# EAGLE board MRCS-ODX4 (EAGLE 7.7.0)
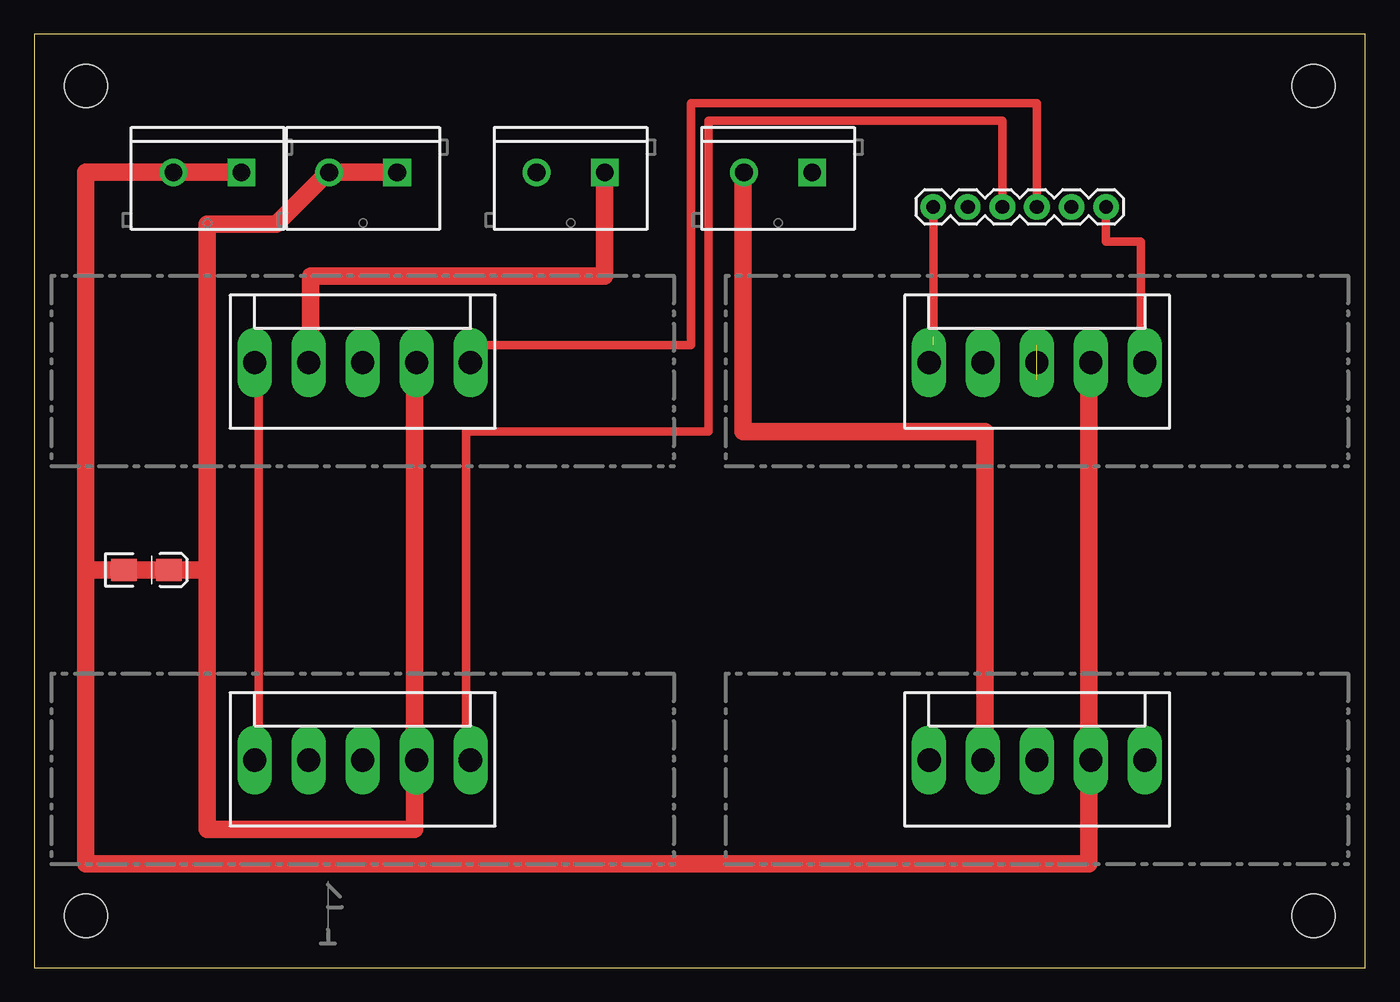
[diagram p0: board, top side]
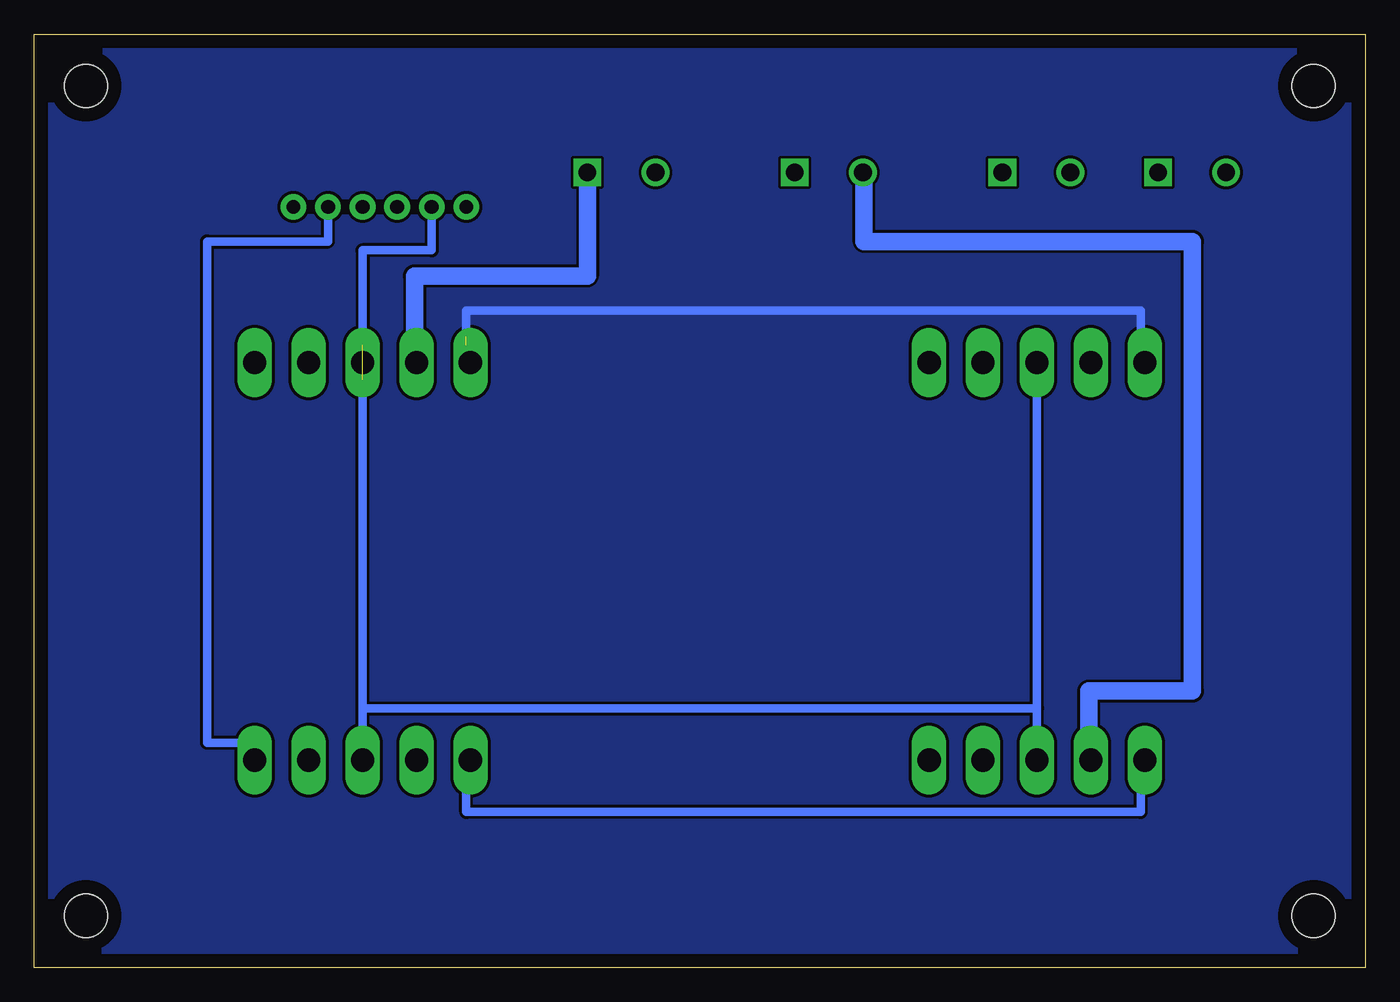
[diagram p1: board, bottom side, seen from below]

Size 97.79 x 68.58 mm. Coordinates in mm from the lower left corner, seen from the top.
Outline: 97.79,0 97.79,68.58 0,68.58 0,0 97.79,0
Copper layers (1*16): Top 0.035mm / dielectric 1.5mm / Bottom 0.035mm
Design rules "default": minimum track width 10mil, minimum drill 24mil, track to track 8mil, track to pad 8mil, pad to pad 8mil, via to via 8mil, smd to smd 8mil, copper to edge 40mil, drill to drill 8mil, minimum pad ring 10mil, minimum via ring 8mil, stop-mask expansion 4mil, vias tented up to drill 0mil, thermal gap 10mil

## Footprints (pad centres in the part's own frame; a part is rotated, then mirrored left to right if it is on the bottom)
DRILL_0.1250 = hole 3.175: 0,0
1X06 = drill 1.016 pad 1.88: 1 0,0; 2 2.54,0; 3 5.08,0; 4 7.62,0; 5 10.16,0; 6 12.7,0
EIA3216-KIT = smd 1.9 x 1.6: A 1.65,0; C -1.65,0
SCREWTERMINAL-5MM-2 = drill 1.3 pad 2.032 square: 1 0,0 | drill 1.3 pad 2.032: 2 5,0
KK-156-5 = drill 1.7 pad 2.184 long: 1 -7.92,0; 2 -3.96,0; 3 0,0; 4 3.96,0; 5 7.92,0

## Placement (x,y rotation side)
E$1  [DRILL_0.1250]  93.98,64.77 0 top
E$2  [MRCSLOGOTOP]  20.32,1.27 0 top
E$3  [1X06]  66.04,55.88 0 top
E$5  SPLIT  [EIA3216-KIT]  8.26,29.21 0 top
E$11  [DRILL_0.1250]  3.81,64.77 0 top
E$12  [DRILL_0.1250]  3.81,3.81 0 top
E$13  [DRILL_0.1250]  93.98,3.81 0 top
J2  [SCREWTERMINAL-5MM-2]  57.15,58.42 180 top
J3  [SCREWTERMINAL-5MM-2]  41.91,58.42 180 top
OD1  [KK-156-5]  73.66,44.45 0 top
OD2  [KK-156-5]  73.66,15.24 0 top
OD3  [KK-156-5]  24.13,44.45 0 top
OD4  [KK-156-5]  24.13,15.24 0 top
SECTA  DCC IN  [SCREWTERMINAL-5MM-2]  15.24,58.42 180 top
SECTB  DCC IN  [SCREWTERMINAL-5MM-2]  26.67,58.42 180 top

## Library data of the parts
E$1 E$11-E$13 = special-drill
E$2 = MRCSLogoTop
E$3 = SparkFun-Connectors.#1r
E$5 = SparkFun-Passives
J2 J3 SECTA SECTB = SparkFun
OD1-OD4 = con-molex

## Nets
S$3: SECTA.1
S$4: J3.1
S$5: J2.1
S$21: SECTB.1

## Tracks (layer width: path | path; a pad name or v marks a point on that pad's centre or on a via)
GND  (1 unrouted)
  Top 0.61: 66.04,46.35 66.04,55.88
  Bottom 0.61: 16.51,45.72 16.51,48.26 66.04,48.26 66.04,45.72
  pour Bottom: 0,0 97.79,0 97.79,68.58 0,68.58
S$1
  Top 1.27: 27.94,17.14 27.94,42.55
S$2
  Bottom 1.27: 20.32,16.51 20.32,20.32 12.7,20.32 12.7,53.34 36.83,53.34 36.83,58.42
S$3
  Top 1.27: 3.81,29.21 3.81,7.62 77.47,7.62 77.47,13.34 | 3.81,29.21 3.81,58.42 SECTA.1 | 6.35,29.21 3.81,29.21
S$4
  Top 1.27: J3.1 41.91,50.8 20.32,50.8 20.32,45.72
S$5
  Bottom 1.27: J2.1 57.15,50.8 69.85,50.8 69.85,45.72
S$6
  Top 0.61: 31.75,16.51 31.75,39.37 49.53,39.37 49.53,62.23 71.12,62.23 71.12,55.24
S$8
  Top 0.61: 73.66,55.24 73.66,63.5 48.26,63.5 48.26,45.72 31.75,45.72
S$9
  Bottom 0.61: 81.28,16.51 85.09,16.51 85.09,53.34 76.2,53.34 76.2,55.88
S$11
  Top 0.61: 81.28,45.72 81.28,53.34 78.74,53.34 78.74,55.88
S$13
  Top 1.27: 77.47,42.55 77.47,17.14
S$14
  Bottom 0.61: 66.04,13.97 66.04,11.43 16.51,11.43 16.51,13.97
S$17
  Top 0.61: 16.51,43.18 16.51,16.51
S$18
  Top 1.27: 69.85,16.51 69.85,39.37 52.07,39.37 52.07,58.42
S$21
  Top 1.27: SECTB.1 21.59,58.42 17.78,54.61 12.7,54.61 12.7,29.21 | 12.7,29.21 12.7,10.16 27.94,10.16 27.94,13.34 | 6.99,29.21 12.7,29.21
VIN  (1 unrouted)
  Bottom 0.61: 68.58,55.88 68.58,52.7 73.66,52.7 73.66,45.72 | 24.13,16.51 24.13,19.05 | 24.13,19.05 24.13,43.18 | 73.66,19.05 24.13,19.05 | 73.66,16.51 73.66,19.05 | 73.66,19.05 73.66,43.18

## Text on the board
tDocu: DCC | DCC In | Out | OD4 | OD3 | OD2 | OD1 | Sect A | Sect B | GND | +Vin | OccOut 4 | OccOut 3 | OccOut 2 | OccOut 1 | J1 | Top | Top | 5 | 4 | 3 | 2 | 1 | 1 | OccOut | 2 | Track Com | 3 | +Vin | 4 | Track Out | 5 | Logic Gnd | Top | Top | MRCS Designs | ODX4 Occupancy Detector Extender | 0414-2015 v1.6 | cpNode ODX4